# Altium PCB EFR32xG1x_DISC_REF_DES_A00.PcbDoc (part 1 of 2)
Units mil, origin at the board's own origin, x right, y up, seen from the top; angles counter-clockwise.
Board outline 1181.1 x 1771.65 mil, 4 copper layers (Top Layer, Signal Layer 2, Signal Layer 3, Bottom Layer), stack 63.229 mil thick; 88 components, 86 nets, 332 pads, 389 vias.
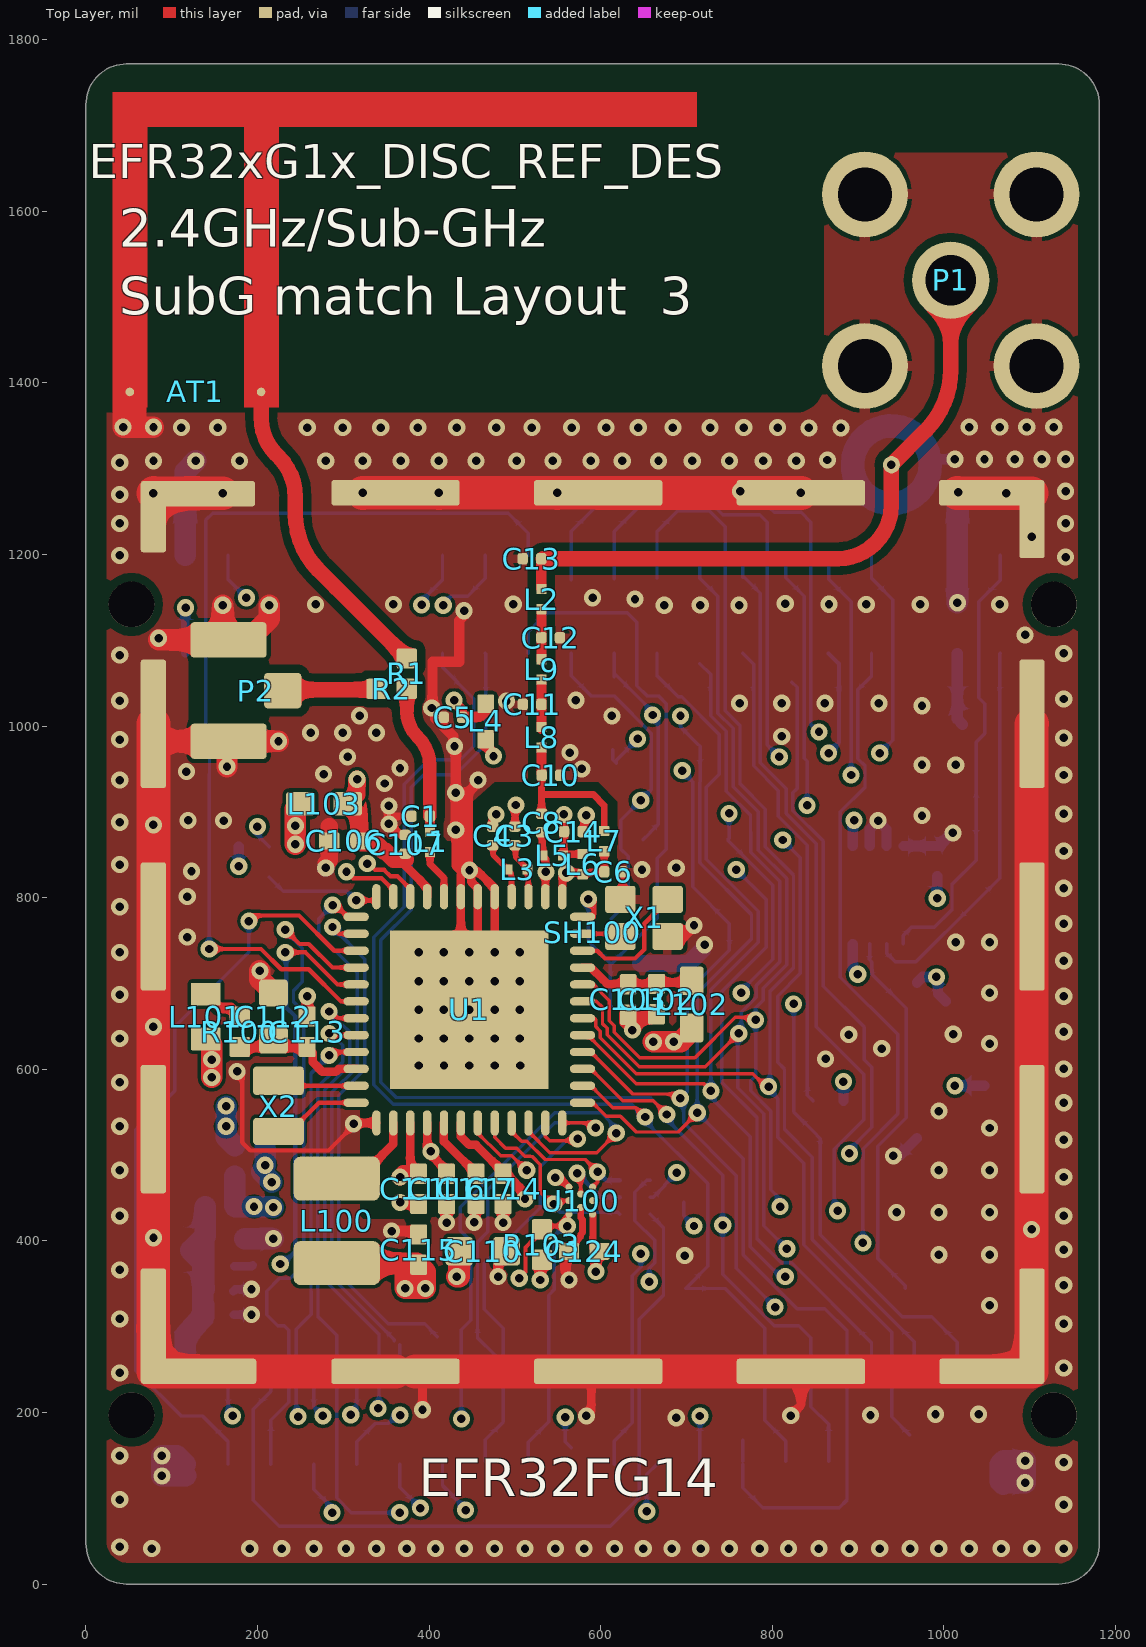
[diagram p0: Top Layer view]
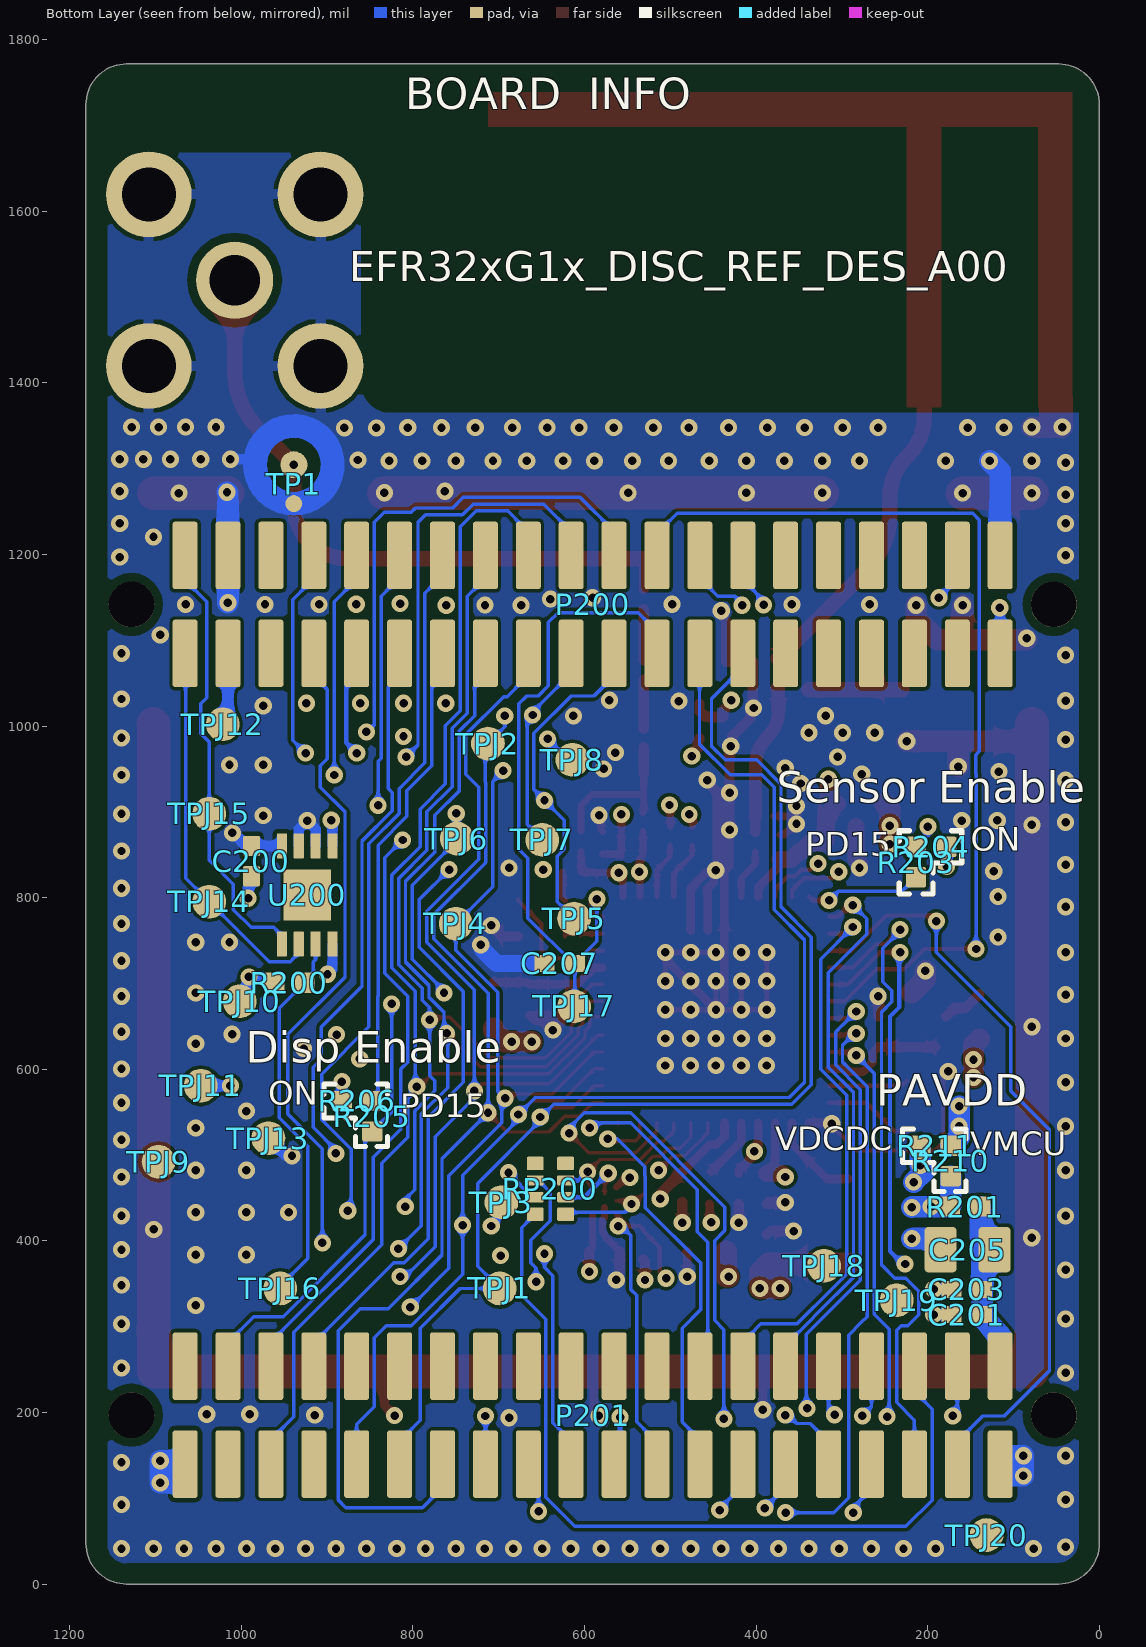
[diagram p1: Bottom Layer view, seen from below]
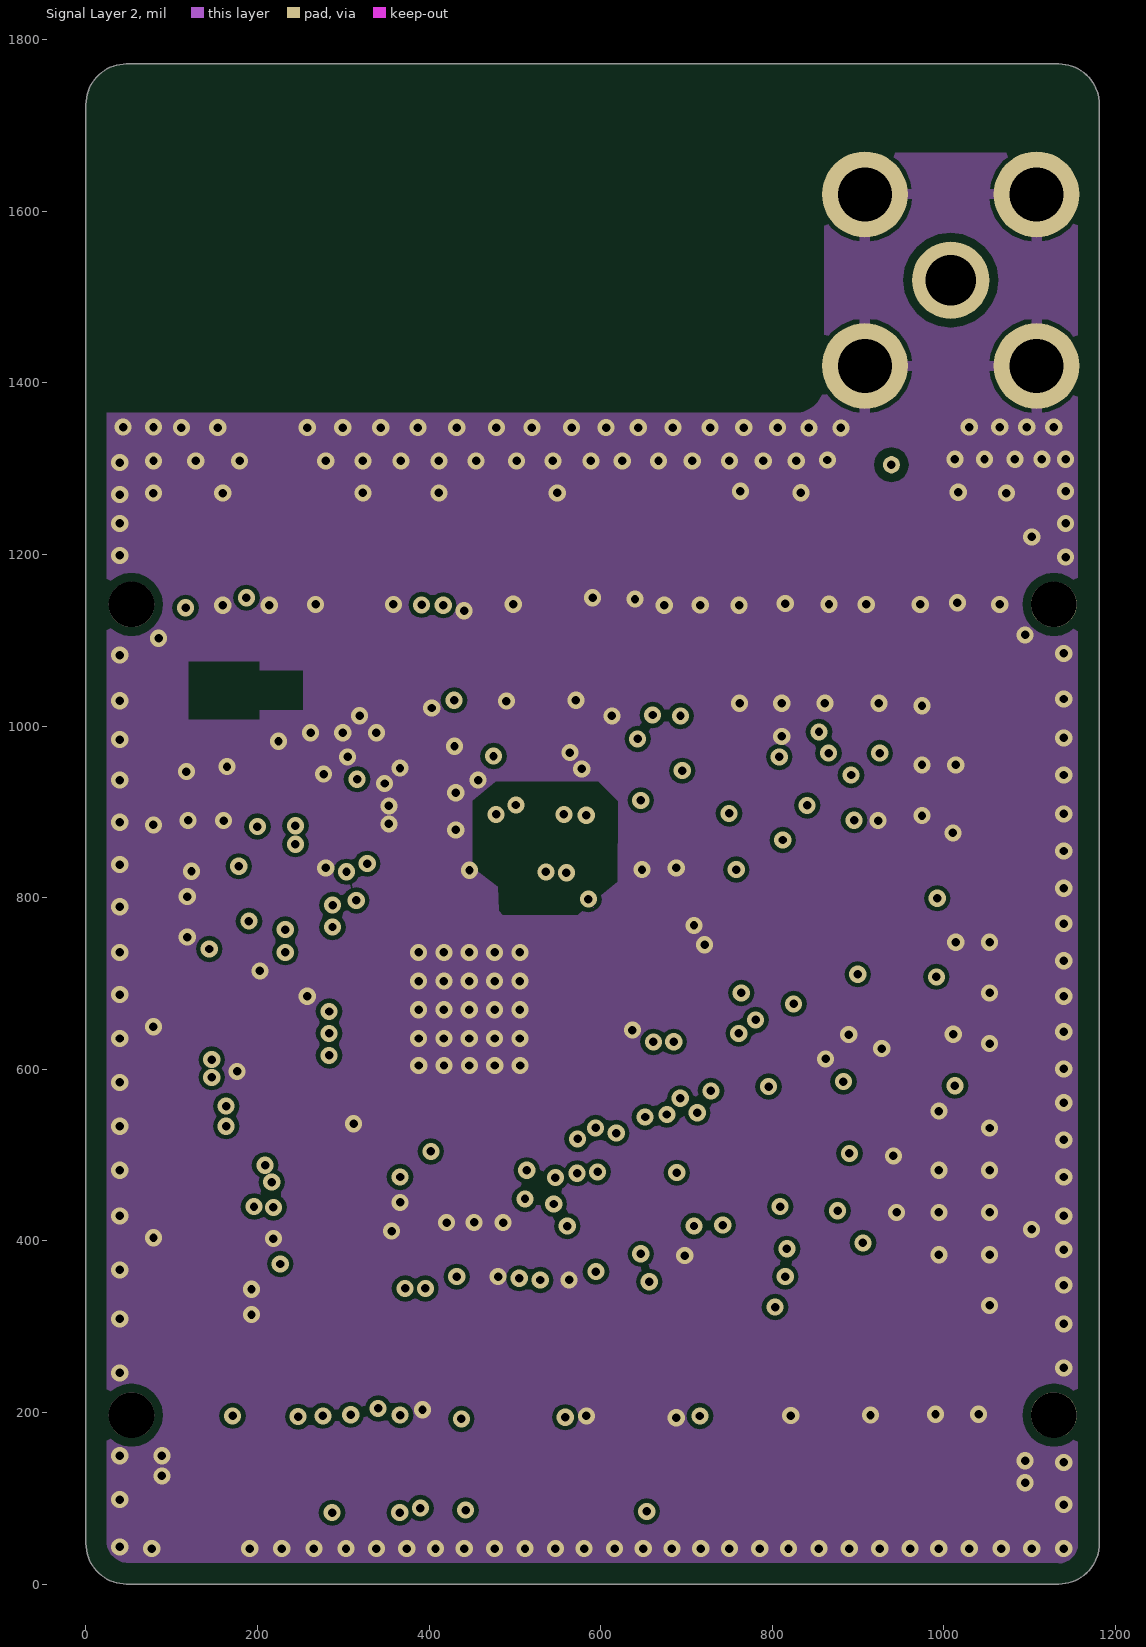
[diagram p2: Signal Layer 2]
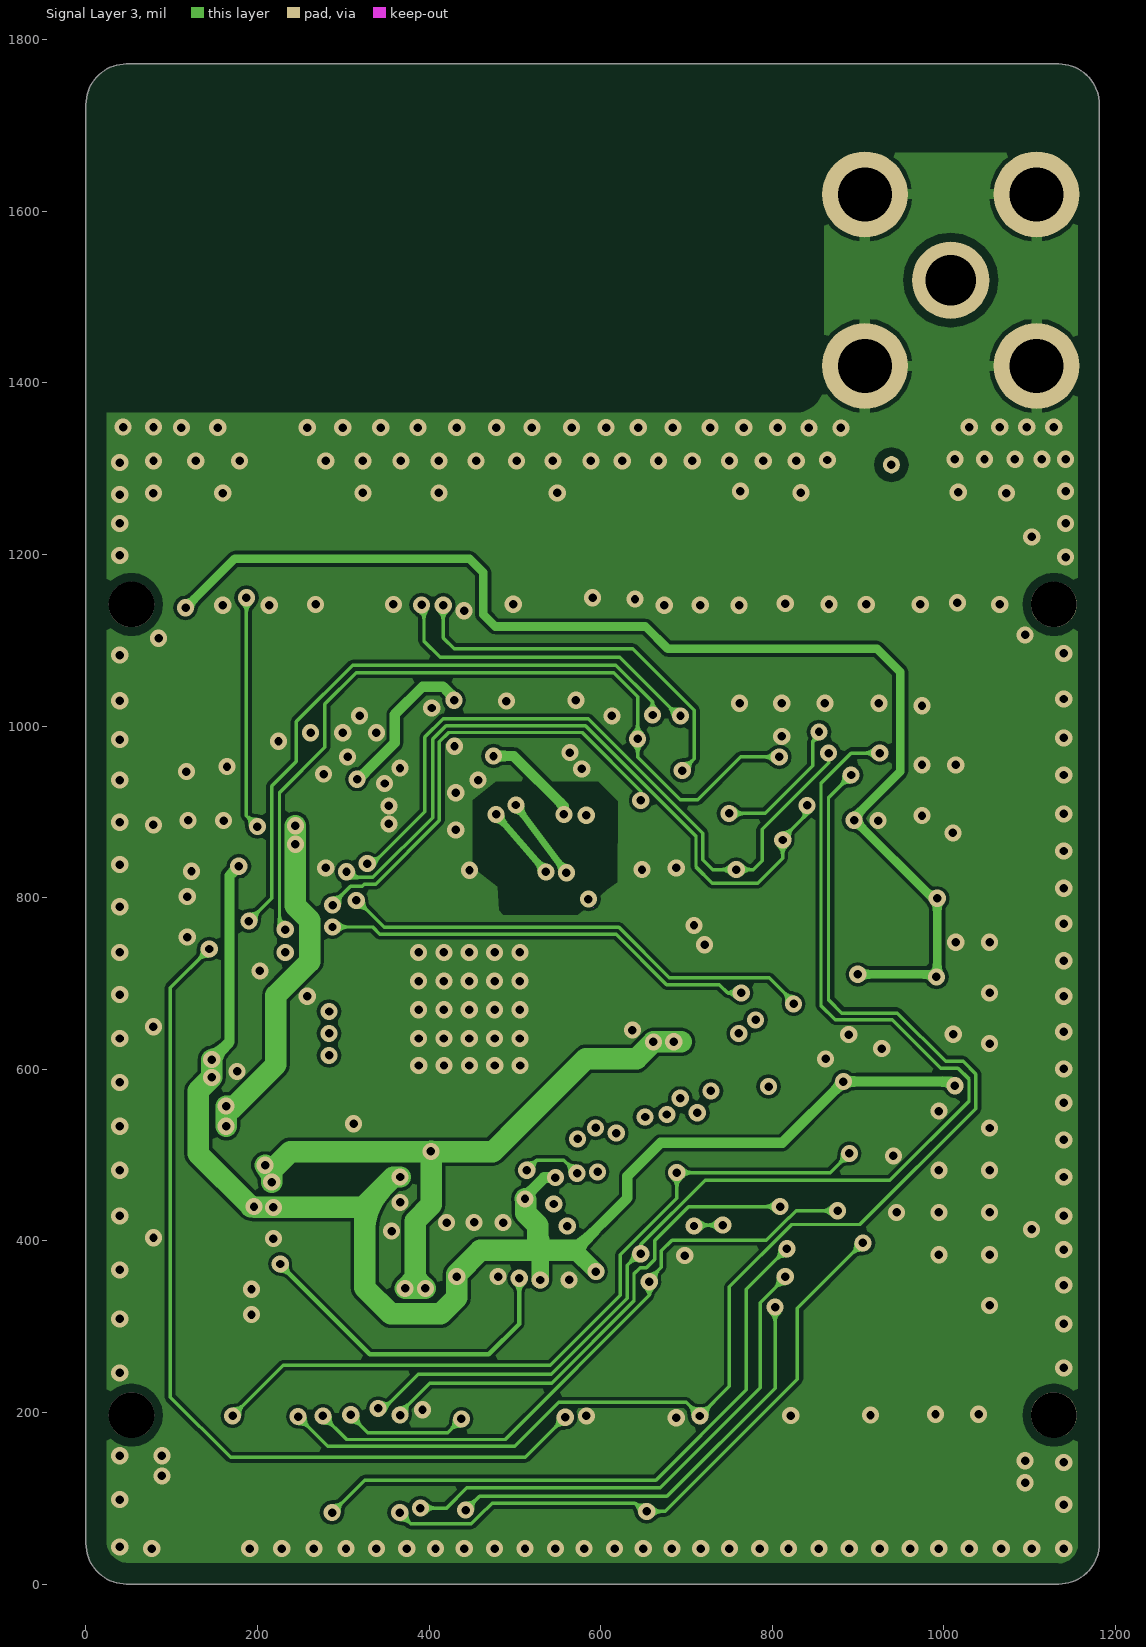
[diagram p3: Signal Layer 3]

## Layer stack, top to bottom
Top Solder: solder mask 0.3937, Solder Resist, Dk 3.5
Top Layer: signal copper 1.378
Dielectric 1: core 11.811, FR-4, Dk 4.2
Signal Layer 2: signal copper 0.7087
Dielectric 3: prepreg 35.4331, Dk 4.2
Signal Layer 3: signal copper 0.7087
Dielectric 2: core 11.811, FR-4, Dk 4.2
Bottom Layer: signal copper 1.378
Bottom Solder: solder mask 0.3937, Solder Resist, Dk 3.5

## Board outline
0,47.24 ccw(c47.24,47.24) 47.24,0 1133.86,0 ccw(c1133.86,47.24) 1181.1,47.24 1181.1,1724.41 ccw(c1133.86,1724.41) 1133.86,1771.65 47.24,1771.65 ccw(c47.24,1724.41) 0,1724.41
cut-out: 592,788
cut-out: 592,789

## Design rules (kind name [scope] priority, off if disabled: settings)
Clearance ClearanceANT1 [InComponent('AT1') vs InNet('50R_IFA')] p1: gap=0 ignorepadtopadclearanceinfootprint=FALSE
Clearance Clearance_to_RF3 [InNet('NetC8_1') vs InNet('GND')] p2: gap=4 ignorepadtopadclearanceinfootprint=FALSE except(0: Arc-Hole Track-Hole SMDPad-Hole THPad-Hole Via-Hole Fill-Hole Poly-Hole Region-Hole Text-Hole; 10: Arc-Fill Arc-Poly Arc-Region Track-Fill Track-Poly Track-Region SMDPad-Fill SMDPad-Poly SMDPad-Region THPad-Fill THPad-Poly THPad-Region Via-Fill Via-Poly Via-Region Fill-Fill Fill-Poly Fill-Region Poly-Poly Poly-Region Region-Region)
Clearance Clearance_to_RF2 [InNet('NetC11_1') vs InNet('GND')] p3: gap=4 ignorepadtopadclearanceinfootprint=FALSE except(0: Arc-Hole Track-Hole SMDPad-Hole THPad-Hole Via-Hole Fill-Hole Poly-Hole Region-Hole Text-Hole; 10: Arc-Fill Arc-Poly Arc-Region Track-Fill Track-Poly Track-Region SMDPad-Fill SMDPad-Poly SMDPad-Region THPad-Fill THPad-Poly THPad-Region Via-Fill Via-Poly Via-Region Fill-Fill Fill-Poly Fill-Region Poly-Poly Poly-Region Region-Region)
Clearance Clearance_to_RF1 [InNet('NetC12_1') vs InNet('GND')] p4: gap=10 ignorepadtopadclearanceinfootprint=FALSE except(0: Arc-Text Arc-Hole Track-Text Track-Hole SMDPad-Text SMDPad-Hole THPad-Text THPad-Hole Via-Text Via-Hole Fill-Text Fill-Hole Poly-Text Poly-Hole Region-Text Region-Hole Text-Text Text-Hole; 4: Arc-Arc Arc-Track Arc-SMDPad Arc-THPad Arc-Via Track-Track Track-SMDPad Track-THPad Track-Via SMDPad-SMDPad SMDPad-THPad SMDPad-Via THPad-THPad THPad-Via Via-Via)
Clearance Clearance_to_Holes [InPadClass('NPTH')] p5: gap=10 ignorepadtopadclearanceinfootprint=FALSE except(0: Arc-Hole Track-Hole SMDPad-Hole THPad-Hole Via-Hole Fill-Hole Poly-Hole Region-Hole Text-Hole)
Clearance Clearance_50Ohm [InNetClass('50Ohm') or InNet('50R_*')] p6: gap=9.84 ignorepadtopadclearanceinfootprint=FALSE except(0: Arc-Hole Track-Hole SMDPad-Hole THPad-Hole Via-Hole Fill-Hole Poly-Hole Region-Hole Text-Hole; 6: Arc-SMDPad Track-SMDPad SMDPad-SMDPad)
Clearance Clerance_Polygon_GND3 [InNamedPolygon('GND_3')] p7: gap=5 ignorepadtopadclearanceinfootprint=FALSE except(0: Arc-Hole Track-Hole SMDPad-Hole THPad-Hole Via-Hole Fill-Hole Poly-Hole Region-Hole Text-Hole)
Clearance Clerance_Polygon_GND2 [InNamedPolygon('GND_2')] p8: gap=5 ignorepadtopadclearanceinfootprint=FALSE except(0: Arc-Hole Track-Hole SMDPad-Hole THPad-Hole Via-Hole Fill-Hole Poly-Hole Region-Hole Text-Hole)
Clearance Clerance_Polygon_GND1 [InNamedPolygon('GND_L2')] p9: gap=5 ignorepadtopadclearanceinfootprint=FALSE except(0: Arc-Hole Track-Hole SMDPad-Hole THPad-Hole Via-Hole Fill-Hole Poly-Hole Region-Hole Text-Hole)
Clearance Clerance_Polygon_GND4 [InNamedPolygon('GND_4')] p10: gap=5 ignorepadtopadclearanceinfootprint=FALSE except(0: Arc-Hole Track-Hole SMDPad-Hole THPad-Hole Via-Hole Fill-Hole Poly-Hole Region-Hole Text-Hole)
Clearance Clearance_General [All] p11: gap=4 ignorepadtopadclearanceinfootprint=FALSE except(0: Arc-Hole Track-Hole SMDPad-Hole THPad-Hole Via-Hole Fill-Hole Poly-Hole Region-Hole Text-Hole)
ComponentClearance ComponentClearanceR1/R2 [InComponent('R1') vs InComponent('R2')] p1: gap=0 collisioncheckmode=3 verticalgap=0 showdistances=FALSE
ComponentClearance ComponentClearanceR203/R204 [InComponent('R203') vs InComponent('R204')] p2: gap=0 collisioncheckmode=3 verticalgap=0 showdistances=FALSE
ComponentClearance ComponentClearanceR205/R206 [InComponent('R205') vs InComponent('R206')] p3: gap=0 collisioncheckmode=3 verticalgap=0 showdistances=FALSE
ComponentClearance ComponentClearanceR210/R211 [InComponent('R210') vs InComponent('R211')] p4: gap=0 collisioncheckmode=3 verticalgap=0 showdistances=FALSE
ComponentClearance [All] p5: gap=7.87 collisioncheckmode=3 verticalgap=10 showdistances=FALSE
HoleToHoleClearance HoleToHoleClearance_ANT1toPAD [Incomponent ('ANT1') vs ISpad] p1: gap=0 allowstackedmicrovias=TRUE
HoleToHoleClearance HoleToHoleClearance_U1toVIA_1 [InComponent ('U1') vs IsVia] p2: gap=0 allowstackedmicrovias=TRUE
HoleToHoleClearance [All] p3: gap=10 allowstackedmicrovias=TRUE
MinimumSolderMaskSliver [All] p1: minsoldermaskwidth=4
PolygonConnect PolygonConnect_SH100 [InComponent('SH100')] p1: connectstyle=Direct reliefconductorwidth=10 reliefentries=4 polygonreliefangle="90 Angle" airgapwidth=5
PolygonConnect PolygonConnect_P1 [InComponent('P1')] p2: connectstyle=Relief reliefconductorwidth=12 reliefentries=4 polygonreliefangle="90 Angle" airgapwidth=5
PolygonConnect Polygon_VIA_Connect [IsVia] p3: connectstyle=Direct reliefconductorwidth=10 reliefentries=4 polygonreliefangle="90 Angle" airgapwidth=10
PolygonConnect PolygonConnect_General [All] p4: connectstyle=NoConnect reliefconductorwidth=10 reliefentries=4 polygonreliefangle="90 Angle" airgapwidth=5
RoutingVias [All] p1: holewidth=9.84 width=20 viastyle="Through Hole" minholewidth=9.84 minwidth=20 maxholewidth=39.37 maxwidth=59.06
ShortCircuit ShortCircuitANT1 [InComponent('AT1') vs (InNet('50R_IFA') Or InNet('GND'))] p1: allowed=TRUE
SilkToSilkClearance [All] p1: silktosilkclearance=4
SilkToSolderMaskClearance [IsPad] p1: minsilkscreentomaskgap=4 clearancetoexposedcopper=TRUE
SolderMaskExpansion [All] p1: expansion=2
Width [All] p1: maxlimit=200 minlimit=4 preferedwidth=8
24 further rules are at their usual default settings.

## Classes and differential pairs
net class WSTK_P[45..0]: WSTK_P3 WSTK_P15 WSTK_P17 WSTK_P19 WSTK_P21 WSTK_P23 WSTK_P25 WSTK_P27 WSTK_P29 WSTK_P30 WSTK_P34 WSTK_P36 WSTK_P37 WSTK_P38 WSTK_P39 WSTK_P40 WSTK_P41 WSTK_P42 WSTK_P43 WSTK_P44 WSTK_P45
net class WSTK_F[21..0]: WSTK_F4 WSTK_F14 WSTK_F15 WSTK_F16
net class RADIO_PF[7..0]: RADIO_PF0 RADIO_PF1 RADIO_PF2 RADIO_PF3 RADIO_PF4 RADIO_PF5 RADIO_PF6 RADIO_PF7
net class RADIO_PD[15..13]: RADIO_PD13 RADIO_PD14 RADIO_PD15
net class RADIO_PC[11..6]: RADIO_PC6 RADIO_PC7 RADIO_PC8 RADIO_PC9 RADIO_PC10 RADIO_PC11
net class RADIO_PB[15..11]: RADIO_PB11 RADIO_PB12 RADIO_PB13 RADIO_PB14 RADIO_PB15
net class RADIO_PA[5..0]: RADIO_PA0 RADIO_PA1 RADIO_PA2 RADIO_PA3 RADIO_PA4 RADIO_PA5
component class "04_ WSTK Connectors & B": C200 C201 C203 C205 P200 P201 R200 R201 TPJ1 TPJ2 TPJ3 TPJ4 TPJ5 TPJ6 TPJ7 TPJ8 TPJ9 TPJ10 TPJ11 TPJ12 TPJ13 TPJ14 TPJ15 TPJ16 TPJ17 TPJ18 TPJ19 TPJ20 U200
component class "03_ EFR32 Signal Assign": C124 C207 R103 R203 R204 R205 R206 RP200 U1 U100
component class "02_ RF, Antenna & Power": AT1 C1 C3 C4 C5 C6 C8 C10 C11 C12 C13 C14 C102 C103 C106 C107 C110 C111 C112 C113 C114 C115 C116 C117 L1 L2 L3 L4 L5 L6 L7 L8 L9 L100 L101 L102 L103 P1 P2 R1 R2 R100 R210 R211 SH100 SH101 TP1 X1 X2
pad class NPTH: P200-M1 P200-M2 P201-M1 P201-M2

## Components (designator, comment, footprint, x,y, rotation, side; value= is the part's Value field where it differs from the comment)
AT1 "INVERTED_F" ANT_INV_F_2.4_GHZ_17.3MM_MIR 31.1,1371.65 r0 top locked
C1 "1P5" C0201_L 390,895 r0 top
C3 "1P8" C0201_L 500,872 r270 top
C4 "1P8" C0201_L 474,872 r270 top
C5 "270pF" C0201_L 427.83,1010 r180 top
C6 "5.1P" C0201_L 614.83,830 r0 top
C8 "4P7" C0201_L 531,887 r270 top
C10 "6P2" C0201_L 542,942.66 r0 top
C11 "5.6P" C0201_L 520,1025.23 r180 top
C12 "5P6" C0201_L 541.61,1103 r0 top
C13 "NC" C0201_L 519.83,1195 r180 top
C14 "2P" C0201_L 568,877 r0 top
C102 "100PF" C0402_L 665,681.72 r270 top
C103 "10PF" C0402_L 632,681.28 r270 top
C106 "220NF" C0402_L 301.18,866.14 r180 top
C107 "10P" C0201_L 372.05,862.2 r90 top
C110 "10UF" C0603_L 462.6,387.8 r0 top
C111 "1UF" C0402_L 387.72,460.63 r270 top
C112 "10UF" C0603_L 218.5,661.42 r90 top
C113 "10NF" C0402_L 257.8,643.7 r90 top
C114 "1UF" C0402_L 486.22,460.63 r270 top
C115 "4.7uF" C0402_L 387.8,389.76 r90 top
C116 "100NF" C0402_L 420.28,460.63 r270 top
C117 "1UF" C0402_L 454.72,460.63 r270 top
C124 "100NF" C0402_L 580.71,387.8 r180 top
C200 "100N" C0402_L 988.19,842.52 r90 bottom
C201 "100N" C0402_L 154.53,313.98 r0 bottom
C203 "100N" C0402_L 154.53,343.5 r0 bottom
C205 "10U" C0805_L 153.54,389.76 r0 bottom
C207 "100N" C0402_L 628.94,723.43 r0 bottom
Designator16 "Comment" PCB_SPEC_4_LAYER 1393.94,20246.04 r0 top
L1 "1N9" COIL_0201_L 401,865 r90 top
L2 "120P" COIL_0201_L 531,1148 r270 top
L3 "75NH" COIL_0201_L 503,833 r180 top
L4 "330NH" COIL_0402_L 466,1005.33 r270 top
L5 "12NH" COIL_0201_L 544,849 r180 top
L6 "12NH" COIL_0201_L 579,839 r90 top
L7 "27NH" COIL_0201_L 604,865.81 r270 top
L8 "24NH" COIL_0201_L 531,987 r270 top
L9 "24NH" COIL_0201_L 531,1066 r270 top
L100 "4.7UH" COIL_MUR_LQH3NP_1212 292.32,423.23 r270 top
L101 "CBF102WB" WURTH_CBF_0603 139.76,661.42 r90 top
L102 "BLM18AG601SN1" COIL_MUR_BLM18_0603 706,675.56 r90 top
L103 "BLM18AG601SN1" COIL_MUR_BLM18_0603 277.56,909.45 r0 top
P1 "SMA" TE_SMA_TH_1814832 1007.87,1519.68 r0 top locked
P2 "U.FL" HIROSE_U.FL-R-SMT-1 166.34,1041.34 r270 top
P200 "SOCKET_2X20_1.27MM_SMD" SAM_SFC-120-T2-D-A-2X20_SNUM 590.55,1141.73 r0 bottom locked
P201 "SOCKET_2X20_1.27MM_SMD" SAM_SFC-120-T2-D-A-2X20_SNUM 590.55,196.85 r0 bottom locked
R1 "0R" R0402_L 374.02,1061.02 r90 top
R2 "0R" R0402_L 356.3,1043.31 r180 top
R100 "1R" R0402_L 179.13,643.7 r270 top
R103 "330K" R0402_L 531.5,395.67 r90 top
R200 "10K" R0402_L 944,700.79 r0 bottom
R201 "0R" R0402_L 156.5,439.96 r0 bottom
R203 "0R" R0402_L 213.58,841.54 r90 bottom
R204 "0R" R0402_L 195.87,859.25 r0 bottom
R205 "0R" R0402_L 847.44,545.28 r90 bottom
R206 "0R" R0402_L 865.16,562.99 r180 bottom
R210 "0R" R0402_L 173.23,493.11 r270 bottom
R211 "0R" R0402_L 190.94,510.83 r0 bottom
RP200 "100R" RES_MNR04-8 639.76,460.63 r90 bottom
SH100 "RF_SHIELD_FRAME_BMI-S-203-F" RF_SHIELD_FRAME_BMI-S-203-F_PCB4100 590.55,759.84 r0 top locked
TP1 "RF_TEST_POINT" "TP_INGUN_50_OHM_CLOSED openvia" 938.78,1304.53 r180 bottom locked
TPJ1 "TPJ_SMD" TP_1.0_SMD#1 698.82,344.49 r90 bottom locked
TPJ2 "TPJ_SMD" TP_1.0_SMD#1 712.6,979.53 r90 bottom locked
TPJ3 "TPJ_SMD" TP_1.0_SMD#1 696.85,444.88 r90 bottom locked
TPJ4 "TPJ_SMD" TP_1.0_SMD#1 750,769.68 r90 bottom locked
TPJ5 "TPJ_SMD" TP_1.0_SMD#1 612.2,775.59 r90 bottom locked
TPJ6 "TPJ_SMD" TP_1.0_SMD#1 748.82,868.9 r90 bottom locked
TPJ7 "TPJ_SMD" TP_1.0_SMD#2 649.21,867.32 r90 bottom locked
TPJ8 "TPJ_SMD" TP_1.0_SMD#1 614.17,960.63 r90 bottom locked
TPJ9 "TPJ_SMD" TP_1.0_SMD#1 1096.46,492.13 r90 bottom locked
TPJ10 "TPJ_SMD" TP_1.0_SMD#1 1001.97,679.13 r90 bottom locked
TPJ11 "TPJ_SMD" TP_1.0_SMD#1 1047.24,580.71 r90 bottom locked
TPJ12 "TPJ_SMD" TP_1.0_SMD#1 1021.65,1001.97 r90 bottom locked
TPJ13 "TPJ_SMD" TP_1.0_SMD#1 968.5,519.68 r90 bottom locked
TPJ14 "TPJ_SMD" TP_1.0_SMD#1 1037.4,795.28 r90 bottom locked
TPJ15 "TPJ_SMD" TP_1.0_SMD#1 1037.4,897.64 r90 bottom locked
TPJ16 "TPJ_SMD" TP_1.0_SMD#1 954.72,344.49 r90 bottom locked
TPJ17 "TPJ_SMD" TP_1.0_SMD#1 612.2,673.23 r90 bottom locked
TPJ18 "TPJ_SMD" TP_1.0_SMD#1 320.87,370.87 r90 bottom locked
TPJ19 "TPJ_SMD" TP_1.0_SMD#1 236.22,330.71 r90 bottom locked
TPJ20 "TPJ_SMD" TP_1.0_SMD#1 131.5,57.09 r90 bottom locked
U1 "EFR32FG14P233F256GM48" QFN48_M050_SQ7.0_EP_SL_L 446.85,669.29 r180 top
U100 "MX25R8035F" BGA8_M040_1.24x1.75_WLCSP 576.69,446.85 r180 top
U200 "24AA024" TDFN8_M050_2.0x3.0_EP 923.23,803.15 r0 bottom
X1 "38.400 MHz" X_SSS_DSX211SH_2.05X1.65-4 650.44,776.35 r0 top
X2 "32.768 kHz" X_MCS_CM8V-T1A 224.33,557.09 r90 top

## Footprints (in the part's own frame and the unit in brackets; to place one, negate y for a bottom-side part, rotate by r counter-clockwise, add the part's x,y. Pads: shape width x height; smd on the part's side, far side on the other; paste and mask are expansions set on the pad)
ANT_INV_F_2.4_GHZ_17.3MM_MIR [mil] "Antenna inverted F, 2.4 GHz, 17.3 mm (MIR)"
  round 10 smd paste-5 mask-5: 1(173,17.72) 2(20.01,17.72)
  Top Layer region: 0.36,367.2 681,367.2 681,327.07 193.36,327.07 193.36,0 153.36,0 153.36,327.07 40.36,327.07 40.36,0 20.36,0 0.36,0
BGA8_M040_1.24x1.75_WLCSP [mm] "BGA, 8 pin. U100"
  round 0.21 smd mask+0.051: A1(-0.35,0.4) A3(0.35,0.4) B2(0,0.2) C1(-0.35,0) C3(0.35,0) D2(0,-0.2) E1(-0.35,-0.4) E3(0.35,-0.4)
  body extent -0.63,-0.89 0.63,0.88, height 0.52
C0201_L [mm]
  rrect52% 0.31x0.34 smd: 1(-0.275,0) 2(0.275,0)
  body extent -0.3,-0.15 0.3,0.15, height 0.3
C0402_L [mm] "Chip Capacitor, 2-Leads, Body 1.0x0.5mm, IPC High Density"
  rrect20% 0.6x0.5 smd mask+0.051: 1(-0.45,0) 2(0.45,0)
  body extent -0.5,-0.25 0.5,0.25, height 0.6
C0603_L [mm] "Capacitor, 0603, High Density (C)"
  rrect25% 0.8x0.85 smd: 1(-0.7,0) 2(0.7,0)
  body extent -0.88,-0.48 0.87,0.48, height 0.95
C0805_L [mm] "Capacitor, 0805"
  rrect25% 0.95x1.35 smd: 1(-0.8,0) 2(0.8,0)
  body extent -1.1,-0.72 1.1,0.72, height 1.45
COIL_0201_L [mm]
  rrect10% 0.3x0.3 smd: 1(-0.3,0) 2(0.3,0)
  body extent -0.32,-0.17 0.32,0.17, height 0.33
COIL_0402_L [mm]
  rrect20% 0.55x0.5 smd mask+0.051: 1(-0.525,0) 2(0.525,0)
  body extent -0.5,-0.25 0.5,0.25, height 0.6
COIL_MUR_BLM18_0603 [mm] "COIL_MUR_BLM18P_0603"
  rrect25% 0.85x0.7 smd mask+0.051: 1(-0.7,0) 2(0.7,0)
  body extent -0.88,-0.48 0.87,0.48, height 0.95
COIL_MUR_LQH3NP_1212 [mm] "COIL_MUR_LQH3NP_1212"
  rrect30% 1.3x2.55 smd mask+0.051: 1(-1.25,0) 2(1.25,0)
  body extent -1.6,-1.6 1.6,1.6, height 1.5
HIROSE_U.FL-R-SMT-1 [mm] "COAX_HIROSE_U.FL_CL331-0471"
  rrect20% 1.05x1.1 smd mask+0.051: 1(0,1.6)
  rrect20% 1.05x2.25 smd mask+0.051: 2(-1.5,0) 3(1.5,0)
  Top Layer pour cut-out: -0.85,0.9 0.85,0.9 0.85,0.9 0.85,-1.2 -0.85,-1.2 -0.85,-1.2
  body extent -1.3,-1.55 1.3,1.3, height 0.9
PCB_SPEC_4_LAYER [mil]
QFN48_M050_SQ7.0_EP_SL_L [mm] "QFN48_M050_SQ7.0_EP, SiLabs, High Density (C)"
  oval 0.75x0.25 smd: 1(-3.35,2.75) 2(-3.35,2.25) 3(-3.35,1.75) 4(-3.35,1.25) 5(-3.35,0.75) 6(-3.35,0.25) 7(-3.35,-0.25) 8(-3.35,-0.75) 9(-3.35,-1.25) 10(-3.35,-1.75) 11(-3.35,-2.25) 12(-3.35,-2.75) 25(3.35,-2.75) 26(3.35,-2.25) 27(3.35,-1.75) 28(3.35,-1.25) 29(3.35,-0.75) 30(3.35,-0.25) 31(3.35,0.25) 32(3.35,0.75) 33(3.35,1.25) 34(3.35,1.75) 35(3.35,2.25) 36(3.35,2.75)
  oval 0.25x0.75 smd: 13(-2.75,-3.35) 14(-2.25,-3.35) 15(-1.75,-3.35) 16(-1.25,-3.35) 17(-0.75,-3.35) 18(-0.25,-3.35) 19(0.25,-3.35) 20(0.75,-3.35) 21(1.25,-3.35) 22(1.75,-3.35) 23(2.25,-3.35) 24(2.75,-3.35) 37(2.75,3.35) 38(2.25,3.35) 39(1.75,3.35) 40(1.25,3.35) 41(0.75,3.35) 42(0.25,3.35) 43(-0.25,3.35) 44(-0.75,3.35) 45(-1.25,3.35) 46(-1.75,3.35) 47(-2.25,3.35) 48(-2.75,3.35)
  rrect50% 1.9x1.9 on Top Paste mask-0.805: 49(-1.15,1.15) 49(-1.15,-1.15) 49(1.15,1.15) 49(1.15,-1.15)
  rect 4.7x4.7 smd paste-4.7: 49(0,0)
  body extent -3.5,-3.5 3.5,3.5, height 0.9
R0402_L [mm] "Chip Resistor, 2-Leads, Body 1.0x0.5mm, IPC High Density"
  rrect20% 0.6x0.6 smd mask+0.051: 1(-0.45,0) 2(0.45,0)
  body extent -0.5,-0.25 0.5,0.25, height 0.6
RES_MNR04-8 [mm] "Chip resistor network 8pin"
  rrect20% 0.4x0.5 smd mask+0.051: 1(-0.75,-0.45) 4(0.75,-0.45) 5(0.75,0.45) 8(-0.75,0.45)
  rrect20% 0.3x0.5 smd mask+0.051: 2(-0.25,-0.45) 3(0.25,-0.45) 6(0.25,0.45) 7(-0.25,0.45)
  body extent -1,-0.4 1,0.4, height 0.5
RF_SHIELD_FRAME_BMI-S-203-F_PCB4100 [mm] "RF_SHIELD_FRAME_BMI-S-203-F"
  rrect20% 0.75x3.8 smd paste+0 mask+0.05: 1(-13.005,-5.835) 1(-13.005,0.165) 1(-13.005,6.165) 1(13.005,-5.835) 1(13.005,0.165) 1(13.005,6.165)
  rrect20% 0.75x3.4 smd paste+0 mask+0.05: 1(-13.005,-11.659) 1(13.005,-11.659)
  rrect20% 0.75x2.1 smd paste+0 mask+0.05: 1(-13.005,12.294)
  oval 0.75x0.254 smd paste+0 mask+0.05: 1(-13.004,12.994) 1(12.994,12.994) 1(12.994,12.994) 1(12.994,12.994)
  rrect20% 3.375x0.75 smd paste+0 mask+0.05: 1(-11.684,12.979)
  rrect20% 3.4x0.75 smd paste+0 mask+0.05: 1(-11.659,-13.005)
  rrect20% 3.8x0.75 smd paste+0 mask+0.05: 1(-5.835,-13.005) 1(-5.835,13.005) 1(0.165,-13.005) 1(0.165,13.005) 1(6.165,-13.005) 1(6.165,13.005)
  rrect20% 3.1x0.75 smd paste+0 mask+0.05: 1(11.811,-13.005)
  rrect20% 3.125x0.75 smd paste+0 mask+0.05: 1(11.811,13.005)
  rrect20% 0.75x2.3 smd paste+0 mask+0.05: 1(13.005,12.217)
  body extent -13.3,-13.3 13.3,13.3, height 5.5
SAM_SFC-120-T2-D-A-2X20_SNUM [mm]
  rrect20% 0.74x2 smd mask+0.05: 1(-12.065,1.45) 2(-12.065,-1.45) 3(-10.795,1.45) 4(-10.795,-1.45) 5(-9.525,1.45) 6(-9.525,-1.45) 7(-8.255,1.45) 8(-8.255,-1.45) 9(-6.985,1.45) 10(-6.985,-1.45) 11(-5.715,1.45) 12(-5.715,-1.45) 13(-4.445,1.45) 14(-4.445,-1.45) 15(-3.175,1.45) 16(-3.175,-1.45) 17(-1.905,1.45) 18(-1.905,-1.45) 19(-0.635,1.45) 20(-0.635,-1.45) 21(0.635,1.45) 22(0.635,-1.45) 23(1.905,1.45) 24(1.905,-1.45) 25(3.175,1.45) 26(3.175,-1.45) 27(4.445,1.45) 28(4.445,-1.45) 29(5.715,1.45) 30(5.715,-1.45) 31(6.985,1.45) 32(6.985,-1.45) 33(8.255,1.45) 34(8.255,-1.45) 35(9.525,1.45) 36(9.525,-1.45) 37(10.795,1.45) 38(10.795,-1.45) 39(12.065,1.45) 40(12.065,-1.45)
  round 1.35 hole 1.35 unplated paste-5.563 mask-5.563: M1(13.652,0) M2(-13.652,0)
  body extent -14.65,-1.58 14.65,2.25, height 4.57
TDFN8_M050_2.0x3.0_EP [mm] "TDFN8_M050_2.0x3.0_EP"
  rrect20% 0.3x0.75 smd mask+0.051: 1(-0.75,-1.45) 2(-0.25,-1.45) 3(0.25,-1.45) 4(0.75,-1.45) 5(0.75,1.45) 6(0.25,1.45) 7(-0.25,1.45) 8(-0.75,1.45)
  rect 1.4x1.5 smd mask+0.051: 9(0,0)
  body extent -1,-1.5 1,1.5, height 1
TE_SMA_TH_1814832 [mm]
  round 2.286 hole 1.5: 1(0,0)
  round 2.54 hole 1.6: 2(-2.54,-2.54) 3(2.54,-2.54) 4(2.54,2.54) 5(-2.54,2.54)
  body extent -3.2,-3.2 3.2,3.2, height 9.5
TP_1.0_SMD#1 [mm] "Test Point, 1.0 mm, SMD"
  round 1 smd paste-0.501: 1(0,0)
TP_1.0_SMD#2 [mm] "Test Point, 1.0 mm, SMD"
  round 1 smd: 1(0,0)
"TP_INGUN_50_OHM_CLOSED openvia" [mm] "TP_INGUN_50_OHM_CLOSED"
  round 0.8 / inner round 0.508 / far side round 0.508 hole 0.25 mask+0: 1(0,0)
  round 0.5 smd paste-0.255 mask-0.41: 2(0,-1.15)
  Top Layer lines w0.7: 0,-1.15 cw(c0,0) -1.15,0 cw(c0,0) 0,-1.15
WURTH_CBF_0603 [mm] "COIL_WURTH_CBF_0603_L (= L0603_0.8_L)"
  rrect10% 0.67x0.88 smd: 1(-0.665,0) 2(0.665,0)
  body extent -0.87,-0.48 0.87,0.48, height 0.95
X_MCS_CM8V-T1A [mm] "Crystal MCS CM8V-T1A (2 pin)"
  rrect25% 0.8x1.5 smd paste-0.15 mask+0.051: 1(-0.75,0)
  rrect25% 0.85x1.5 smd paste-0.15 mask+0.051: 2(0.75,0)
  body extent -1,-0.6 1,0.6, height 0.97
X_SSS_DSX211SH_2.05X1.65-4 [mm] "X_SSS_DSX211SH_2.05X1.65-4"
  rrect20% 0.9x0.8 smd mask+0.051: 1(-0.7,-0.55) 2(0.7,-0.55) 3(0.7,0.55) 4(-0.7,0.55)
  body extent -1.07,-0.87 1.07,0.87, height 0.5

## Part data
AT1: library part ANT_INVERTED_F
C1 C3 C4: library part C0402, Tolerance=?.05P, Mfg=Murata, Technology=C0G
  C1: Mfg #=GRM1555C1H1R5WA01D
  C3 C4: Mfg #=GRM1555C1H1R6WA01D
C5 C10: library part C0402, Tolerance=?.1P, Mfg=Murata, Mfg #=GRM1555C1H6R2BA01D, Technology=C0G
C6: library part C0402
C8 C11 C14: library part C0402, Tolerance=?%, Mfg=Murata, Technology=C0G
  C8 C14: Mfg #=GRM1555C1H271FA01D
  C11: Mfg #=GRM1555C1H110GA01D
C12 C13: library part C0402, Tolerance=?.05pF, Mfg=Murata, Mfg #=GRM1555C1H5R6WA01D, Technology=C0G
C102 C103 C107: library part C0402, Rating=50V, Tolerance=5%, Technology=C0G
C106 C113 C116 C124 C200 C201 C203 C207: library part C0402, Rating=16V, Tolerance=10%, Technology=X7R
C110 C112: library part C0603, Rating=6.3V, Tolerance=20%, Technology=X5R
C111 C114 C117: library part C0402, Rating=25V, Tolerance=10%, Technology=X5R
C115: library part C0402, Rating=6.3V, Tolerance=10%, Technology=X5R
C205: library part C0805, Rating=10V, Tolerance=10%, Not Mounted=NM, Technology=X5R
L1: library part L0402, Tolerance=?.05N, Mfg=Murata, Mfg #=LQP15MN1N9W02D
L2 L7 L8 L9: library part L0402, Tolerance=?%, Mfg=Murata
  L2 L8 L9: Mfg #=LQW15AN24NG00D
  L7: Mfg #=LQW15AN18NG00D
L3 L5 L6: library part L0402
L4: library part L0603
L100: library part LQH3NP, Mfg=Murata, Mfg #=LQH3NPN4R7MM0L
L102 L103: library part BLM18AG, Mfg=Murata, Mfg #=BLM18AG601SN1D, Price_1K=0.027
P1: library part SMA_TH, Mfg="TE Connectivity", Mfg #=5-1814832-1, Price_1K=1.46
P2: library part HIROSE_U.FL, Mfg=Hirose, Mfg #=U.FL-R-SMT-1, Price_1K=0.70
R1 R2 R100 R103 R200 R201 R203 R204 R205 R206 R210 R211: library part R0402, Price_1K=0.005
  R2 R204 R206 R210: Not Mounted=NM
RP200: library part MNR04M0APJ101, Mfg=ROHM, Mfg #=MNR04M0APJ101, Price_1K=0.0122
TP1: library part TP_RF
U1: library part EFR32-DUALBAND-QFN48, Mfg="Silicon Labs", Mfg #=EFR32FG14P233F256GM48-BR
U100: library part MX25R8035, Mfg=Macronix, Mfg #=MX25R8035FBDIL0
X1: library part DSX211SH, Mfg=KDS, Mfg #="DSX211SH 1ZZNAE38400AB0A", Price_1K=0.512
X2: library part CM8V-T1A, Mfg=KDS, Mfg #="DST210 1TJG125DP1A0012", Price_1K=0.3
L101: Mfg="W黵th Electronics", Mfg #=74279266, Price_1K=0.031
P200 P201: Mfg=Samtec, Mfg #=SFC-120-T2-L-D-A-K-TR, Price_1K=3.44
SH100: Mfg="Laird Technologies", Mfg #=BMI-S-203-F, Not Mounted=NM, Price_1K=1.148
U200: Mfg=Microchip, Mfg #=24AA024T-I/MNY, Price_1K=0.22

## Via types
v1: diameter 20, hole 9.84, Top Layer to Bottom Layer, tented both sides, 385 vias
v2: diameter 19.68, hole 9.84, Top Layer to Bottom Layer, tented both sides, 2 vias
v3: diameter 20, hole 9.84, Top Layer to Bottom Layer, 2 vias

## Nets (pads, with @x,y where several pads share a name; then routed paths per layer and width w, separated by ;. In a path a pad name is that pad's centre, name@x,y a point inside that pad or via, vN(x,y) a via of type N, cw(c..) or ccw(c..) an arc to the next point about the centre after c; other vN are vias at no path point)
3V3: C200.1 P200.1 R200.2 TPJ10.1 U200.1 U200.8 | length 1657.4
  Signal Layer 3 w10: v1(116.14,1137.8) 173.23,1194.88 447.12,1194.88 463,1179 463,1130 477,1116 652,1116 678,1090 922,1090 949,1063 949,947.03 895.2,893.23 v1(895.2,890.28) 895.85,890.28 986.91,799.21 v1(992.13,799.21) v1@992.13,708.66 ; v1(899.61,710.63) 990.16,710.63 v1@990.67,710.12
  Bottom Layer w10: P200.1@115.55,1084.65 115.55,1137.2 v1(116.14,1137.8)
  Bottom Layer w12: U200.8@893.7,746.06 893.7,716.53 v1(899.61,710.63) ; U200.1@893.7,860.24 893.7,888.78 v1(895.2,890.28) ; R200.2@968.5,700.79 975.39,707.68 v1(991.14,707.68) 993.11,705.71 993.11,687.99 TPJ10.1@1001.97,679.13 ; v1(992.13,799.21) C200.1@992.13,824.8
5V: P200.37 TPJ12.1 | length 85.2
  Bottom Layer w13: P200.37@1015.55,1084.65 1015.55,1008.07 TPJ12.1@1021.65,1001.97
50R_IFA: AT1.1 R1.2 | length 368
  Top Layer w18: AT1.1@204.1,1389.37 204.1,1359.85 ccw(c265.83,1359.85) 222.18,1316.2 ; 224.64,1313.75 cw(c177.56,1266.73) 244.09,1266.73 244.09,1247.64 ccw(c338.19,1247.64) 271.65,1181.1 291.34,1161.42 R1.2@374.02,1078.74
50R_R1: C1.2 L1.2 R1.1 R2.1 | length 172.2
  Top Layer w8: L1.2@400.91,876.9 L1.2@401,876.81
  Top Layer w12: L1.2@400.91,876.9 C1.2@400.91,895
  Top Layer w15.6: R1.1@374.02,1043.31 374.02,1016.7 ccw(c414.34,1016.7) 385.83,988.19 ; 387.04,986.98 cw(c353.77,953.71) 400.82,953.71 C1.2@400.83,895
50R_SMA: C13.1 L2.1 P1.1 TP1.1 | length 765.8
  Top Layer w12: C13.1@530.65,1195 530.65,1160.16 L2.1@531,1159.81
  Top Layer w18: C13.1@532.94,1194.88 876.97,1194.88 ccw(c875.69,1257.97) 938.78,1256.69 ; 938.78,1259.25 cw(c875.69,1257.97) 938.78,1256.69 ; P1.1@1007.87,1519.68 1007.87,1415.04 cw(c907.87,1415.04) 978.58,1344.33 TP1.1@938.78,1304.53 938.78,1256.69
50R_UFL: P2.1 R2.2 | length 109.7
  Top Layer w15.6: P2.1@229.33,1041.34 P2.1@230.32,1042.32
  Top Layer w18: P2.1@230.32,1042.32 R2.2@338.58,1042.32
BOARD_ID_SCL: P200.39 TPJ14.1 U200.6 | length 449.3
  Bottom Layer w4: U200.6@933.07,746.06 933.07,735.28 943.05,725.3 967.42,725.3 TPJ14.1@1037.4,795.28 1064.96,822.83 1064.96,1084.05 P200.39@1065.55,1084.65
BOARD_ID_SDA: P200.40 TPJ15.1 U200.5 | length 520.8
  Bottom Layer w4: U200.5@952.76,746.06 952.76,755.91 962.13,765.28 988.7,765.28 1009.37,785.95 1009.37,815.47 1037.4,843.5 TPJ15.1@1037.4,897.64 1037.4,981.39 1047.34,991.33 1047.34,1026.01 1040.35,1032.99 1040.35,1144.69 1065.55,1169.88 P200.40@1065.55,1198.82
BOARD_ID_WP: R200.1 TPJ16.1 U200.7 | length 446.3
  Bottom Layer w4: U200.7@913.39,746.06 913.39,727.61 916,725 916,711 956,671 956,543.6 922.73,510.33 922.73,379.42 954.72,347.43 TPJ16.1@954.72,344.49
GND: AT1.2 C1.1 C5.2 C6.2 C10.2 C11.2 C12.2 C13.2 C14.2 C102.2 C103.2 C106.2 C107.2 C110.2 C111.2 C112.2 C113.2 C114.2 C115.2 C116.2 C117.2 C124.2 C200.2 C201.2 C203.2 C205.2 C207.2 P1.2 P1.3 P1.4 P1.5 P2.2 P2.3 P200.2 P200.38 P201.1 P201.39 SH100.1 TP1.2 TPJ13.1 U1.17 U1.18 U1.19 U1.37 U1.49@446.85,669.29 U100.B2 U200.2 U200.3 U200.4 X1.2 X1.4 | length 6985.9
  Top Layer w5: v1(176.18,597.44) 182.09,591.54 182.09,514.76 191.54,505.31 282.79,505.31 v1@314.88,537.4 ; v1(387.72,736.22) v1(387.72,702.75) 387.72,698.82 v1(387.72,669.29) v1(417.24,669.29) ; v1(417.24,702.75) v1(417.24,669.29) ; v1(446.77,702.75) v1(446.77,669.29) ; v1(446.77,736.22) 468.43,736.22 U1.49@476.3,728.35 ; v1(476.3,736.22) 497.95,736.22 U1.49@505.83,728.35 ; v1(505.83,669.29) v1(476.3,669.29) U1.49@446.85,669.29 v1(446.77,669.29) ; v1(505.83,702.75) U1.49@505.83,728.35 ; v1(505.83,736.22) U1.49@505.83,728.35 ; v1(417.24,669.29) v1(446.77,669.29)
  Top Layer w8: v1@351,908 351,897 353,895 C1.1@379.17,895 ; v1(353,886) 355.3,883.7 356.3,883.7 366.97,873.03 C107.2@372.05,873.03 ; v1@353,891.49 v1(353,907) ; v1@429,968 v1@431.1,968 ; C124.2@558.98,387.8 576.69,405.51 576.69,407.5 578.93,409.74 578.93,424.65 576.69,426.88 U100.B2@576.69,438.98 ; C14.2@578.83,877 580.91,879.09 580.91,893.91 v1(583,896) ; X1.4@622.88,798 625.65,800.77 C6.2@625.65,830 ; C103.2@626.98,655.48 627.7,656.19 650.63,656.19 ; C103.2@626.98,664.28 627.48,663.78 664.78,663.78 C102.2@665,664 665,662.03 659.16,656.19 650.63,656.19 ; v1(636.83,645.64) 640.07,645.64 650.63,656.19 ; C1.1@379.17,895 378.58,895 379.17,894.41 C1.1@379.17,895
  Top Layer w10: v1@314.88,537.4 U1.37@338.5,537.4 ; SH100.1@360.83,247.83 384.1,247.83 392.24,239.69 v1(392.24,203.1) ; v1@431,876.84 431,837 436,832 v1(447,832) v1@448.06,830.94 ; U1.49@437.01,679.13 U1.19@437.01,801.18 437.01,826.76 v1@439.12,828.88 ; 441,918.29 457,934.29 v1(457,937) ; v1(446.77,669.29) U1.49@505.83,728.35 ; v1(452.38,421.42) 454.25,423.29 454.25,442.44 C117.2@454.72,442.91 ; U1.49@456.61,761.73 U1.18@456.61,801.18 ; U1.18@456.69,801.18 456.69,810.87 448.91,818.65 448.91,830.09 v1@448.06,830.94 ; U1.49@476.3,761.73 U1.17@476.38,801.18 ; U1.17@476.38,801.18 476.38,810.87 456.3,830.94 v1@448.06,830.94 ; C110.2@480.24,387.8 481.81,386.22 480.32,384.72 v1(480.32,358.27) ; v1(583.29,196.01) 589.09,201.81 589.09,239.88 SH100.1@597.05,247.83 ; v1(821.38,196.38) 833.27,208.27 SH100.1@833.27,247.83
  Top Layer w12: v1(39.29,838.58) v1@39.29,840.55 ; C113.2@257.8,661.42 257.8,684.96 v1(257.87,685.04) ; v1(356.3,411.42) C115.2@383.74,411.42 ; C115.2@383.76,411.44 C115.2@387.72,407.48 ; v1(420.28,421.26) C116.2@420.28,442.91 ; v1@431.17,879.84 431.28,879.95 431.28,893 ; v1@432,873 431,874 v1(431,922.24) 431,967.9 431.1,968 428,971.1 428,988 407,1009 407,1023 404,1026 404,1074.8 435.04,1074.8 435.04,1123.03 v1@440.97,1128.96 ; v1(486.14,421.26) C114.2@486.14,444.88 ; 558.98,364.17 C124.2@558.98,387.8 ; C103.2@626.98,664.28 626.98,655.48 v1(636.83,645.64) ; X1.2@678,754.69 695.64,754.69 v1(708.66,767.72) ; SH100.1@1102.36,1218.5 v1(1102.36,1220.47) ; v1(366.06,444.88) 385.75,444.88 C111.2@387.72,442.91 368.03,442.91 v1(366.06,444.88)
  Top Layer w20: v1(279.54,834.69) 279.68,834.82 279.68,840.12 283.46,843.91 C106.2@283.46,866.14 283.46,882.81 ; 441,918.29 441,838 v1(447,832)
  Top Layer w25: v1(78.74,1348.42) 58.07,1348.43 ; v1@84.65,1100.39 P2.2@160.43,1100.39 ; SH100.1@90.55,982.28 P2.3@166.34,982.28 ; v1(159.45,1140.75) 159.45,1107.28 P2.2@166.34,1100.39 188.98,1100.39 213.58,1125 v1(213.58,1140.75) ; v1(164.37,952.76) 164.37,978.35 163.39,979.33 P2.3@166.34,982.28 ; v1(202.76,714.57) 202.76,704.72 C112.2@218.5,688.98 ; v1(224.41,982.28) P2.3@166.34,982.28 ; 58.07,1348.43 58.07,1382.41 AT1.2@51.11,1389.37 43.31,1381.57 v1(43.31,1348.43) 58.07,1348.43
  Top Layer w39.37: SH100.1@78.54,247.87 SH100.1@78.54,530.12 SH100.1@78.54,766.34 ; v1(78.56,649.61) v1(78.56,884.84) SH100.1@78.54,1002.56 ; SH100.1@78.98,1271.85 v1(78.56,1271.44) v1(159.45,1271.44) ; SH100.1@90.55,259.84 78.56,247.85 SH100.1@360.83,247.83 ; v1(322.83,1271.65) 323.03,1271.85 SH100.1@360.83,1271.85 SH100.1@411.22,1271.85 ; SH100.1@384.1,247.83 SH100.1@597.05,247.83 SH100.1@827.56,247.83 ; v1(411.42,1271.65) SH100.1@411.22,1271.85 ; v1(549.21,1271.65) SH100.1@549.41,1271.85 ; SH100.1@760.8,1271.65 597.24,1271.65 SH100.1@597.05,1271.85 SH100.1@549.41,1271.85 ; SH100.1@764.86,1271.65 833.07,1271.65 v1(833.27,1271.85) SH100.1@833.68,1271.44 ; SH100.1@833.27,247.83 SH100.1@1102.13,247.83 ; SH100.1@1015.75,1271.65 1015.96,1271.44 v1(1072.83,1271.44) SH100.1@1102.15,1271.44 ; SH100.1@1102.15,247.85 v1(1102.15,413.39) 1102.15,1002.15 SH100.1@1102.56,1002.56 ; SH100.1@411.22,1271.85 SH100.1@549.41,1271.85
  Signal Layer 3 w12: v1@590.58,1148.68 v1@591.51,1149.61
  Bottom Layer w10: C203.2@171.77,341.06 174.21,343.5 v1(192.91,343.5) ; C201.2@172.24,313.98 v1(192.91,313.98) 195.87,313.98 195.87,312.01 v1@195.39,311.54 ; C205.2@172.76,370.59 193.43,370.59 C205.2@194.41,371.58
  Bottom Layer w12: U200.2@913.39,860.24 913.39,879.92 v1(923.23,889.76) 933.07,879.92 U200.3@933.07,860.24 ; v1(940.99,499.04) 947.86,499.04 TPJ13.1@968.5,519.68 ; U200.4@952.76,860.24 992.13,860.24 994.09,860.24 1009.37,875.51 v1(1010.35,875.51) ; 984.06,1304.53 990.55,1311.02 v1(1012.8,1311.02)
  Bottom Layer w20: C207.2@646.65,723.43 702.76,723.43 v1@718.57,739.24
  Bottom Layer w25: P201.1@114.17,127.95 116.14,125.98 v1(88.58,125.98) v1(88.58,149.61) 105.71,149.61 P201.1@115.55,139.76 ; P200.2@115.55,1198.82 115.55,1296.65 v1(127.95,1309.06) ; C205.2@185.04,402.56 v1(218.5,402.56) ; v1(1015.75,1143.7) 1015.75,1198.62 P200.38@1015.55,1198.82 1015.55,1271.24 v1(1016.73,1272.42) ; P201.39@1065.55,139.76 1090.55,139.76 v1(1094.49,143.7) ; P201.39@1065.55,139.76 1069.49,143.7 v1(1094.49,143.7) ; P201.39@1065.55,139.76 1065.55,119.49 1068.9,116.14 1070.87,118.11 v1(1094.49,118.11) v1(1094.49,143.7)
  other v1: 76.69,41.34 190.87,41.34 228.27,41.34 265.67,41.34 303.07,41.34 338.5,41.34 373.94,41.34 407.4,41.34 440.87,41.34 476.3,41.34 511.73,41.34 547.17,41.34 580.63,41.34 616.06,41.34 649.53,41.34 682.99,41.34 716.46,41.34 749.92,41.34 785.35,41.34 818.82,41.34 854.25,41.34 889.69,41.34 925.12,41.34 960.55,41.34 994.02,41.34 1029.45,41.34 1066.85,41.34 1102.28,41.34 1139.69,41.34 39.29,43.31 1139.69,92.52 39.29,98.43 1139.69,141.73 39.29,149.61 687.99,193.9 914.37,196.85 990.16,197.83 1040.35,197.83 39.29,246.06 1139.69,251.97 1139.69,303.15 39.29,309.06 1053.15,324.8 1139.69,348.43 563.06,354.5 39.29,366.14 697.83,382.87 994.09,383.86 1053.15,383.86 1139.69,389.76 78.74,403.54 39.29,429.13 1139.69,429.13 944.88,433.07 994.09,433.07 1053.15,433.07 1139.69,474.41 39.29,482.28 994.09,482.28 1053.15,482.28 1139.69,517.72 1053.15,531.5 39.29,533.46 311.93,536.42 994.09,551.18 1139.69,561.02 39.29,584.65 1139.69,600.39 387.8,604.33 417.32,604.33 446.85,604.33 476.38,604.33 505.91,604.33 862,612 927.43,624 1053.15,629.92 39.29,635.83 387.72,635.83 417.24,635.83 446.77,635.83 476.3,635.83 505.83,635.83 889,640.37 1010.83,640.75 1139.69,643.7 1139.69,685.04 39.29,687.01 1053.15,688.98 476.3,702.75 1139.69,726.38 39.29,736.22 417.24,736.22 721,745 1013.78,748.03 1053.15,748.03 118.11,753.94 1139.69,769.68 39.29,789.37 118.11,801.18 1139.69,811.02 123.03,830.71 648.08,832.68 688,834.69 1139.69,854.33 431,879 39.29,887.8 119,890 160.43,889.76 974.41,895.67 1139.69,897.64 348,933 39.29,937.01 1139.69,942.91 277,944 117.13,946.85 577.84,950 366,951 974.41,954.72 1013.78,954.72 305,964 564.05,969 429.55,976.5 39.29,984.25 1139.69,986.22 811,988 261.81,992.13 299.21,992.13 338.58,992.13 319,1012 613,1011.81 403,1021 974.41,1023.62 761.85,1026.62 810.97,1026.62 861.22,1026.62 924.21,1026.62 39.29,1029.53 490,1029.1 571,1030 1139.69,1031.5 39.29,1082.68 1139.69,1084.65 84.61,1102.32 1094.49,1106.3 440.72,1134.31 674,1140.75 716,1141 761.22,1140.75 267.72,1141.73 358.27,1141.73 498,1142 866,1142 909.45,1141.73 972.44,1141.73 1064.96,1141.73 815,1142.74 639.87,1148 590.55,1149.61 1141.73,1196.85 39.37,1198.82 39.37,1236.22 1141.73,1236.22 39.37,1269.68 762.83,1273.68 1141.73,1273.62 39.37,1307.09 78.74,1309.05 179.13,1309.06 279.53,1309.05 322.83,1309.05 367.13,1309.05 411.42,1309.05 454.72,1309.05 501.97,1309.05 544.29,1309.06 588.58,1309.05 625,1309.05 667.32,1309.05 706.69,1309.05 750,1309.05 789.37,1309.05 827.76,1309.06 864.17,1310.04 1047.24,1311.02 1082.68,1311.02 1114.17,1311.02 1141.73,1311.02 842.52,1347.44 879.92,1347.44 111.22,1347.77 153.54,1347.77 257.87,1347.77 299.21,1347.77 343.5,1347.77 386.81,1347.77 432.09,1347.77 478.35,1347.77 519.69,1347.77 565.94,1347.77 606.3,1347.77 643.7,1347.77 684.06,1347.77 727.36,1347.77 766.73,1347.77 806.1,1347.77 1029.53,1348.43 1064.96,1348.43 1096.46,1348.43 1127.95,1348.43
NetC3_1: C3.1 C6.1 L6.1 L7.2 U1.13 | length 222.6
  Top Layer w8: C3.1@500,882.83 500,907 v2(501,908) ; U1.13@555,813 ccw(c555,821) U1.13@555.12,813 ; U1.13@555.12,801.18 U1.13@555.12,813 ; L7.2@604,854 C6.1@604,830 603.5,829.5 560.5,829.5 v1(560,829) 555.12,824.12 U1.13@555.12,813
  Signal Layer 3 w8: v2(501,908) v1(560,829)
NetC3_2: C3.2 L3.1 U1.15 | length 67.6
  Top Layer w6: C3.2@500,861.17 500.59,861.17 500.59,847.22 L3.1@514.81,833 L3.1@514,833 ; L3.1@515,833 515.4,832.6 515.4,801.53 U1.15@515.75,801.18
NetC4_1: C4.1 C8.2 L5.2 U1.14 | length 184.8
  Top Layer w8: C4.1@474,882.83 474,897 v2(478,897) ; C8.2@531.91,877.26 531.91,849 536,844.91 v1(536,830) 535.43,829.43 U1.14@535.43,801.18
  Signal Layer 3 w8: v2(478,897) v1(536,830)
NetC4_2: C4.2 L3.2 U1.16 | length 70.3
  Top Layer w6: C4.2@474,861.17 474.5,861.17 474.5,849.69 L3.2@491.19,833 L3.2@491,833 ; L3.2@492,834 492,832.19 496.06,828.13 U1.16@496.06,801.18
NetC8_1: C8.1 C10.1 L7.1 L8.2 | length 183.9
  Top Layer w8: C10.1@531,944.83 531,920 531,899.83 C8.1@532,898.83 ; 531.91,920 591.46,920 604,907.46 L7.1@604,877.62
  Top Layer w12: C10.1@531,944.83 L8.2@531,975.19
NetC11_1: C11.1 L8.1 L9.2 | length 57.4
  Top Layer w12: L8.1@531,996.81 L8.1@531,998.81 531,1025 L9.2@531,1054.19
NetC12_1: C12.1 L2.2 L9.1 | length 58.6
  Top Layer w12: C12.1@530.83,1107 530.83,1136.02 L2.2@531,1136.19 ; C12.1@530.91,1106.09 L9.1@531,1077.81 L9.1@531,1076.81
NetC14_1: C14.1 L4.2 L5.1 L6.2 | length 210
  Top Layer w8: v3(557,897) 557.09,896.91 C14.1@557.09,877.09 ; C14.1@557.17,877 557.17,848.64 L5.1@558.17,849.64 ; L5.1@559.35,850.81 L6.2@579,850.81
  Top Layer w12: L4.2@466,986 L4.2@466,984.66 468,982.66 468,975.25 475,968.25 v3(475,965)
  Signal Layer 3 w12: v3(475,965) 498.8,965 557,906.8 v3(557,897)
NetC102_1: C102.1 C103.1 L102.2 U1.9 | length 137.1
  Top Layer w10: U1.9@578.74,718.5 588.43,718.5 594.19,712.74 594.35,712.74 602.5,704.59 602.5,704.43 607.93,699 C103.1@632,699 632.22,699.22 664.78,699.22 C102.1@665,699.43 666.84,701.28 704.16,701.28 L102.2@706,703.12
NetC112_1: C112.1 C113.1 R100.2 U1.34 | length 143.7
  Top Layer w10: C113.1@257.8,625.98 264.39,619.39 264.39,608.27 275.52,597.14 291.26,597.14 294.51,600.39 U1.34@314.96,600.39
  Top Layer w12: 190.94,625.98 C113.1@257.8,625.98
NetC117_1: C117.1 U1.41 | length 71.8
  Top Layer w10: U1.41@417.24,537.4 417.24,515.75 C117.1@452.68,480.31
NetL1_1: L1.1 U1.20 | length 58.6
  Top Layer w8: L1.1@401,853 401,839 417.32,822.68 U1.20@417.32,801.18
NetL100_1: L100.1 U1.38 | length 106.8
  Top Layer w10: L100.1@292.85,472.11 317.58,472.11 358.19,512.72 U1.38@358.27,537.4
NetL101_2: L101.2 R100.1 | length 50.2
  Top Layer w12: L101.2@139.76,687.6 155.81,671.56 169,671.56 R100.1@179.13,661.42
NetU1_10: U1.10 X1.3 | length 149.5
  Top Layer w5: U1.10@578.74,738.19 595.81,738.19 605,729 640,729 650.59,739.59 650.59,769.59 677.17,796.17 X1.3@677.17,798
NetU1_11: U1.11 X1.1 | length 51.5
  Top Layer w5: U1.11@578.66,757.87 U1.11@578.74,757.87 620,757.87 622.88,760.76 X1.1@622.88,754.69
PAVDD: L103.1 R210.1 R211.1 | length 506.8
  Top Layer w25: v1(244.09,862.2) v1(244.09,883.86) 244.09,903.54 L103.1@250,909.45
  Signal Layer 3 w25: v1(163.39,533.46) v1(163.39,557.09) 165.43,557.09 169.37,553.15 221.46,605.24 221.46,686.1 260.82,725.46 260.82,773.7 244.09,790.43 v1(244.09,862.2) v1(244.09,883.86)
  Bottom Layer w25: v1(163.39,557.09) v1(163.39,533.46) 163.39,520.67 R210.1@173.23,510.83
RADIO_PA0: P200.19 P201.12 TPJ5.1 U1.25 | length 1549.9
  Top Layer w5: v1@295.28,787.4 305.12,777.56 U1.25@314.96,777.56
  Signal Layer 3 w4: v1(287.4,791.34) 287.4,792.31 308.33,813.24 321.85,813.24 324.21,815.61 337.71,815.61 412,889.89 412,981.58 422.92,992.5 578.19,992.5 646.65,924.04 v1(646.65,913.4)
  Bottom Layer w4: v1(287.4,791.34) 271.32,775.26 271.32,757.21 315.94,712.59 315.94,602.37 286.54,572.97 286.54,357.55 306.91,337.18 307.01,337.18 359.25,284.94 P201.12@359.25,283.46 ; P201.12@365.55,253.94 P201.12@365.55,279.13 ; P200.19@565.55,1084.65 565.55,1058.46 589.02,1035 615.63,1035 659,991.63 659,926 646.65,913.65 v1(646.65,913.4) 623.53,890.27 623.53,856.68 632,848.21 632,795.39 TPJ5.1@612.2,775.59
RADIO_PA1: P200.20 P201.14 TPJ6.1 U1.26 | length 2139.5
  Top Layer w5: v1(287.32,765.75) 295.2,757.87 U1.26@314.96,757.87
  Signal Layer 3 w4: v1(287.32,765.75) 334.19,765.75 342.61,757.33 617.93,757.33 676.63,698.63 738.03,698.63 747.68,688.98 v1(763.78,688.98) ; v1(749.53,898.15) 791.51,898.15 847,953.64 847,981.59 854.33,988.92 v1(854.33,993.11)
  Bottom Layer w4: v1(287.32,765.75) 324.8,728.27 324.8,599.92 294.54,569.66 294.54,360.86 310.23,345.18 310.32,345.18 352.35,303.15 394.69,303.15 P201.14@409.45,288.39 ; P200.20@565.55,1170.71 P200.20@565.55,1198.82 565.55,1226.97 605.32,1266.73 741.14,1266.73 753.71,1254.16 797.02,1254.16 802.17,1249.02 833.66,1249.02 844.98,1237.69 844.98,1001.47 v1@854.33,992.13 ; TPJ6.1@748.82,868.9 748.82,866.37 800.68,814.51 800.68,728.32 763.78,691.42 v1(763.78,688.98) ; TPJ6.1@749.53,868.9 v1(749.53,898.15)